# Altium PCB PCB1.PcbDoc
Units mm, origin at the board's own origin, x right, y up, seen from the top; angles counter-clockwise.
Board outline 152.4 x 101.6 mm, 2 copper layers (Top Layer, Bottom Layer); 18 components, 10 nets, 44 pads, 26 vias.
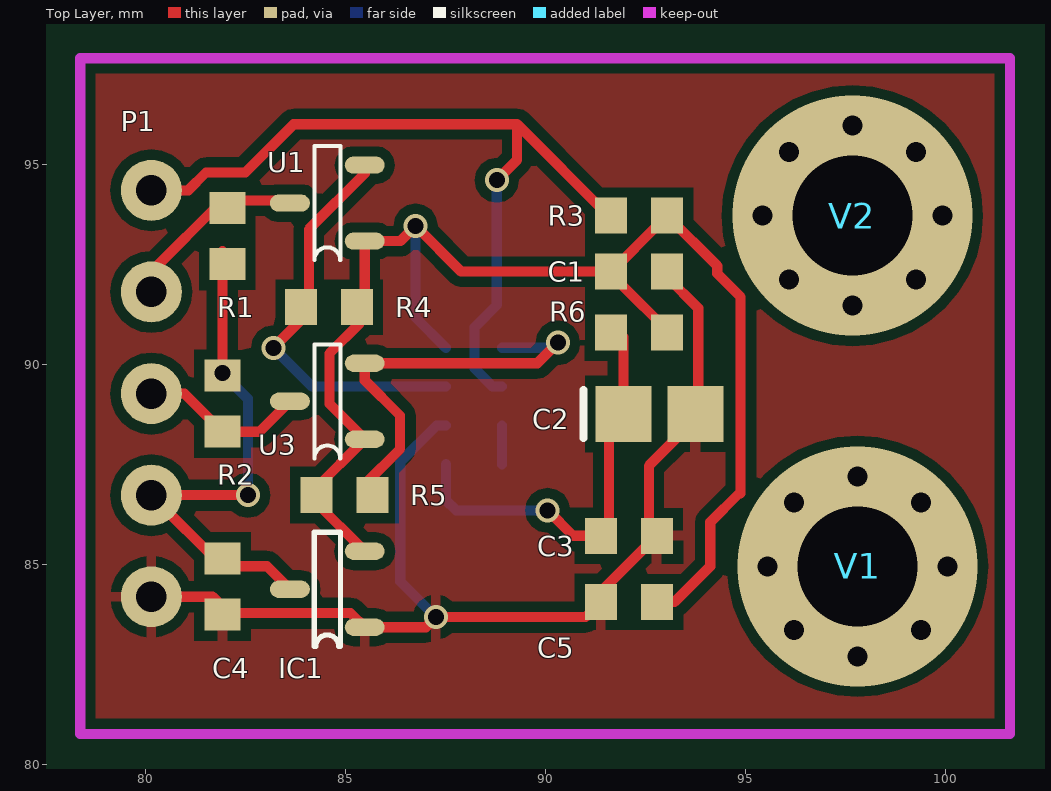
[diagram p0: Top Layer view]
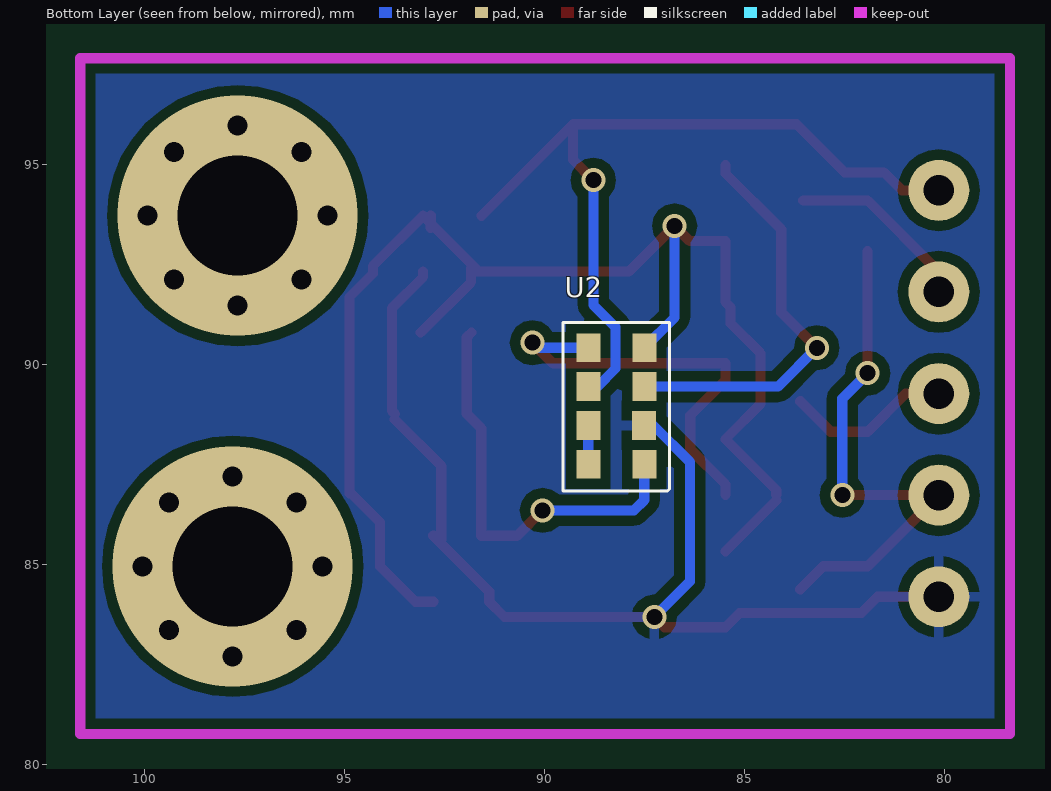
[diagram p1: Bottom Layer view, seen from below]

## Layer stack, top to bottom
Top Layer: signal copper 0.0356
Dielectric: dielectric 0.32, FR-4, Dk 4.8
Bottom Layer: signal copper 0.0356

## Board outline
25.4,25.4 177.8,25.4 177.8,127 25.4,127

## Design rules (kind name [scope] priority, off if disabled: settings)
Clearance [All] p1: gap=0.254
PolygonConnect [All] p1: connectstyle=Relief reliefconductorwidth=0.254 reliefentries=4 polygonreliefangle="90 Angle"
RoutingVias [All] p1: holewidth=0.711 width=1.27 viastyle="Through Hole" minholewidth=0.711 minwidth=1.27 maxholewidth=0.711 maxwidth=1.27
SilkscreenOverComponentPads [All] p1: minsilkscreentomaskgap=0.254
SolderMaskExpansion [All] p1: expansion=0.102
Width [All] p1: maxlimit=0.254 minlimit=0.254 preferedwidth=0.254
27 further rules are at their usual default settings.

## Components (designator, comment, footprint, x,y, rotation, side; value= is the part's Value field where it differs from the comment)
C1 "Cap Semi" 1608[0603] 92.329,92.329 r180 top
C2 "Cap Semi" C2512 92.837,88.773 r0 top
C3 "Cap Semi" 1608[0603] 92.075,85.725 r0 top
C4 "Cap Semi" 1608[0603] 81.915,84.455 r270 top
C5 "Cap Semi" 1608[0603] 92.075,84.074 r180 top
IC1 "XC6206P332MR" SOT-23 85.471,83.439 r180 top
P1 "SH-4.0" SH-4.0 80.137,89.281 r90 top
R1 "Res2" 1608[0603] 82.042,93.218 r270 top
R2 "Res2" 1608[0603] 81.915,89.027 r90 top
R3 "Res2" 1608[0603] 92.329,93.726 r0 top
R4 "Res2" 1608[0603] 84.582,91.44 r0 top
R5 "Res2" 1608[0603] 84.963,86.741 r180 top
R6 "Res2" 1608[0603] 92.329,90.805 r0 top
U1 "SI2302" SOT-23 85.471,93.091 r180 top
U2 "APDS-9960" APDS-9960 88.9,90.424 r180 bottom
U3 "SI2302" SOT-23 85.471,88.138 r180 top
V1 "Via" Via 97.79,84.963 r0 top
V2 "Via" Via 97.663,93.726 r0 top

## Footprints (in the part's own frame and the unit in brackets; to place one, negate y for a bottom-side part, rotate by r counter-clockwise, add the part's x,y. Pads: shape width x height; smd on the part's side, far side on the other; paste and mask are expansions set on the pad)
1608[0603] [mm] "Chip Capacitor, Body 1.6x0.8mm, IPC High Density"
  rect 0.8x0.9 smd: 1(-0.7,0) 2(0.7,0)
  body extent -0.87,-0.48 0.87,0.48, height 1.3
APDS-9960 [mm]
  rect 0.6x0.72 smd: 1(0,0) 2(0,-0.97) 3(0,-1.94) 4(0,-2.91) 5(1.4,-2.91) 6(1.397,-1.94) 7(1.4,-0.97) 8(1.4,0)
  silkscreen extent -0.64,-3.58 2.03,0.64
C2512 [mm] "Chip Capacitor, Body 2.54x1.27mm, IPC High Density"
  rect 1.4x1.4 smd: 1(-0.9,0) 2(0.9,0)
  silkscreen extent -1.9,-0.6 -1.9,0.6, body extent -1.45,-0.82 1.45,0.82, height 1.3
SH-4.0 [mil]
  round 60 hole 30: 1(-200,0) 2(-100,0) 3(0,0) 4(100,0) 5(200,0)
SOT-23 [mm]
  oval 1x0.43 smd: 1(0,0) 2(0,-1.9) 3(1.87,-0.95)
  silkscreen extent 0.61,-2.38 1.26,0.48
Via [mm]

## Part data
C1 C2 C3 C4 C5: "Capacitor (Semiconductor SIM Model)"
R1 R2 R3 R4 R5 R6: "Resistor"
U1 U3: library part IRLML2244TRPbF

## Via types
v1: diameter 1, hole 0.5, Top Layer to Bottom Layer, 16 vias
v2: diameter 0.6, hole 0.4, Top Layer to Bottom Layer, 8 vias
v3: diameter 6, hole 3, Top Layer to Bottom Layer, 2 vias

## Nets (pads, with @x,y where several pads share a name; then routed paths per layer and width w, separated by ;. In a path a pad name is that pad's centre, name@x,y a point inside that pad or via, vN(x,y) a via of type N, cw(c..) or ccw(c..) an arc to the next point about the centre after c; other vN are vias at no path point)
3.3V: C1.2 C5.1 IC1.2 R3.2 R4.2 R5.2 R6.2 U1.1 U2.8 U3.1 | length 35.9
  Top Layer w0.254: R5.2@84.201,86.609 IC1.2 ; R5.2@84.201,86.741 84.201,86.868 U3.1 85.471,88.143 84.59,89.024 84.59,90.285 85.344,91.039 85.344,91.44 85.471,91.567 U1.1 86.36,93.091 v2(86.741,93.472) 87.884,92.329 C1.2 ; C5.1 93.218,84.074 94.107,84.963 94.107,86.061 94.828,86.782 ; R3.2@92.837,93.426 R3.2@92.837,93.534 ; R3.2@92.837,93.726 R3.2@92.837,93.534 ; R6.2@93.091,90.805 91.829,92.067 C1.2@91.829,92.329 ; 94.869,86.782 94.869,91.694 94.282,92.281 94.282,92.473 R3.2 R3.2@92.837,93.534 ; C1.2 91.829,92.418 C1.2@91.829,92.329 ; C1.2 C1.2@91.632,92.329 ; C1.2@91.632,92.329 C1.2@91.829,92.329 ; C1.2@91.632,92.329 R3.2@92.837,93.534
  Bottom Layer w0.254: v2(86.741,93.472) 86.741,91.183 U2.8
GND: C1.1 C2.2 C3.2 C4.2 C5.2 IC1.1 P1.1 U2.6 | length 27.3
  Top Layer w0.254: P1.1 81.669,84.201 82.077,83.793 85.117,83.793 IC1.1 86.995,83.439 v2(87.249,83.693) 90.994,83.693 C5.2 91.375,84.325 C3.2 ; C3.2@92.575,85.636 92.575,87.472 C2.2@93.737,88.634 ; C1.1 93.029,92.194 93.81,91.413 93.81,88.846 C2.2 C2.2@93.789,88.826
  Bottom Layer w0.254: v2(87.249,83.693) 86.36,84.582 86.36,87.573 87.271,88.484 U2.6
INT: P1.5 R3.1 U2.2 | length 20.5
  Top Layer w0.254: P1.5 81.059,94.361 81.503,94.805 82.486,94.805 83.693,96.012 89.281,96.012 ; v2(88.773,94.615) 89.281,95.123 89.281,96.012 ; R3.1@91.567,93.726 89.281,96.012
  Bottom Layer w0.254: v2(88.773,94.615) 88.773,91.496 88.219,90.942 88.219,89.906 88.671,89.454 U2.2
NetC2_1: C2.1 C3.1 R6.1 U2.5 | length 10.6
  Top Layer w0.254: v2(90.043,86.36) 90.678,85.725 91.575,85.725 91.575,88.411 C2.1 91.937,90.689 R6.1@91.821,90.805
  Bottom Layer w0.254: U2.5 87.5,86.617 87.757,86.36 v2(90.043,86.36)
NetP1_3: P1.3 R2.1 U3.3 | length 4.2
  Top Layer w0.254: P1.3 80.961,89.281 R2.1 82.84,88.327 U3.3
NetP1_4: P1.4 R1.1 U1.3 | length 4.6
  Top Layer w0.254: P1.4 80.137,92.329 81.915,94.107 U1.3@83.535,94.107
NetR4_1: R4.1 U1.2 U2.7 | length 10.2
  Top Layer w0.254: v2(83.185,90.424) 84.074,91.313 84.074,91.44 84.074,93.386 85.471,94.783 U1.2
  Bottom Layer w0.254: v2(83.185,90.424) 84.155,89.454 U2.7
NetR5_1: R5.1 U2.1 U3.2 | length 10.5
  Top Layer w0.254: R5.1@85.471,86.741 85.471,87.01 86.352,87.891 86.352,88.734 85.471,89.615 U3.2 89.784,90.038 v2(90.297,90.551)
  Bottom Layer w0.254: U2.1 90.17,90.424 v2(90.297,90.551)
NetU2_3: U2.3 U2.4 | length 1
  Bottom Layer w0.254: U2.4 U2.3
VCC: C4.1 IC1.3 P1.2 R1.2 R2.2 | length 13.2
  Top Layer w0.254: v2(81.915,89.789) R1.2@81.915,92.837 ; v2(82.55,86.741) P1.2 81.915,84.963 83.027,84.963 IC1.3
  Bottom Layer w0.254: v2(81.915,89.789) 82.55,89.154 v2(82.55,86.741)
copper on no net:
  other v1: 97.79,82.713 96.199,83.372 99.381,83.372 95.54,84.963 100.04,84.963 96.199,86.554 99.381,86.554 97.79,87.213 97.663,91.476 96.072,92.135 99.254,92.135 95.413,93.726 99.913,93.726 96.072,95.317 99.254,95.317 97.663,95.976
  other v3: 97.79,84.963 97.663,93.726

## Polygon pours and split planes (outlines as drawn)
GND on Top Layer "Bottom Layer-No Net" (solid, pour order 6): 78.359,97.663 101.6,97.663 101.6,80.772 78.359,80.772
GND on Bottom Layer "Bottom Layer-No Net" (solid, pour order 8): 78.359,97.663 101.6,97.663 101.6,80.772 78.359,80.772

## Keep-outs
Keep-Out Layer:
  lines w0.254: 78.359,80.772 101.6,80.772 101.6,97.663 78.359,97.663 78.359,80.772